# Altium PCB RGB_sensor_PCB1.PcbDoc
Units mm, origin at the board's own origin, x right, y up, seen from the top; angles counter-clockwise.
Board outline 62.99 x 88.5 mm, 2 copper layers (Top Layer, Bottom Layer), stack 1.071 mm thick; 20 components, 39 nets, 120 pads, 0 vias.
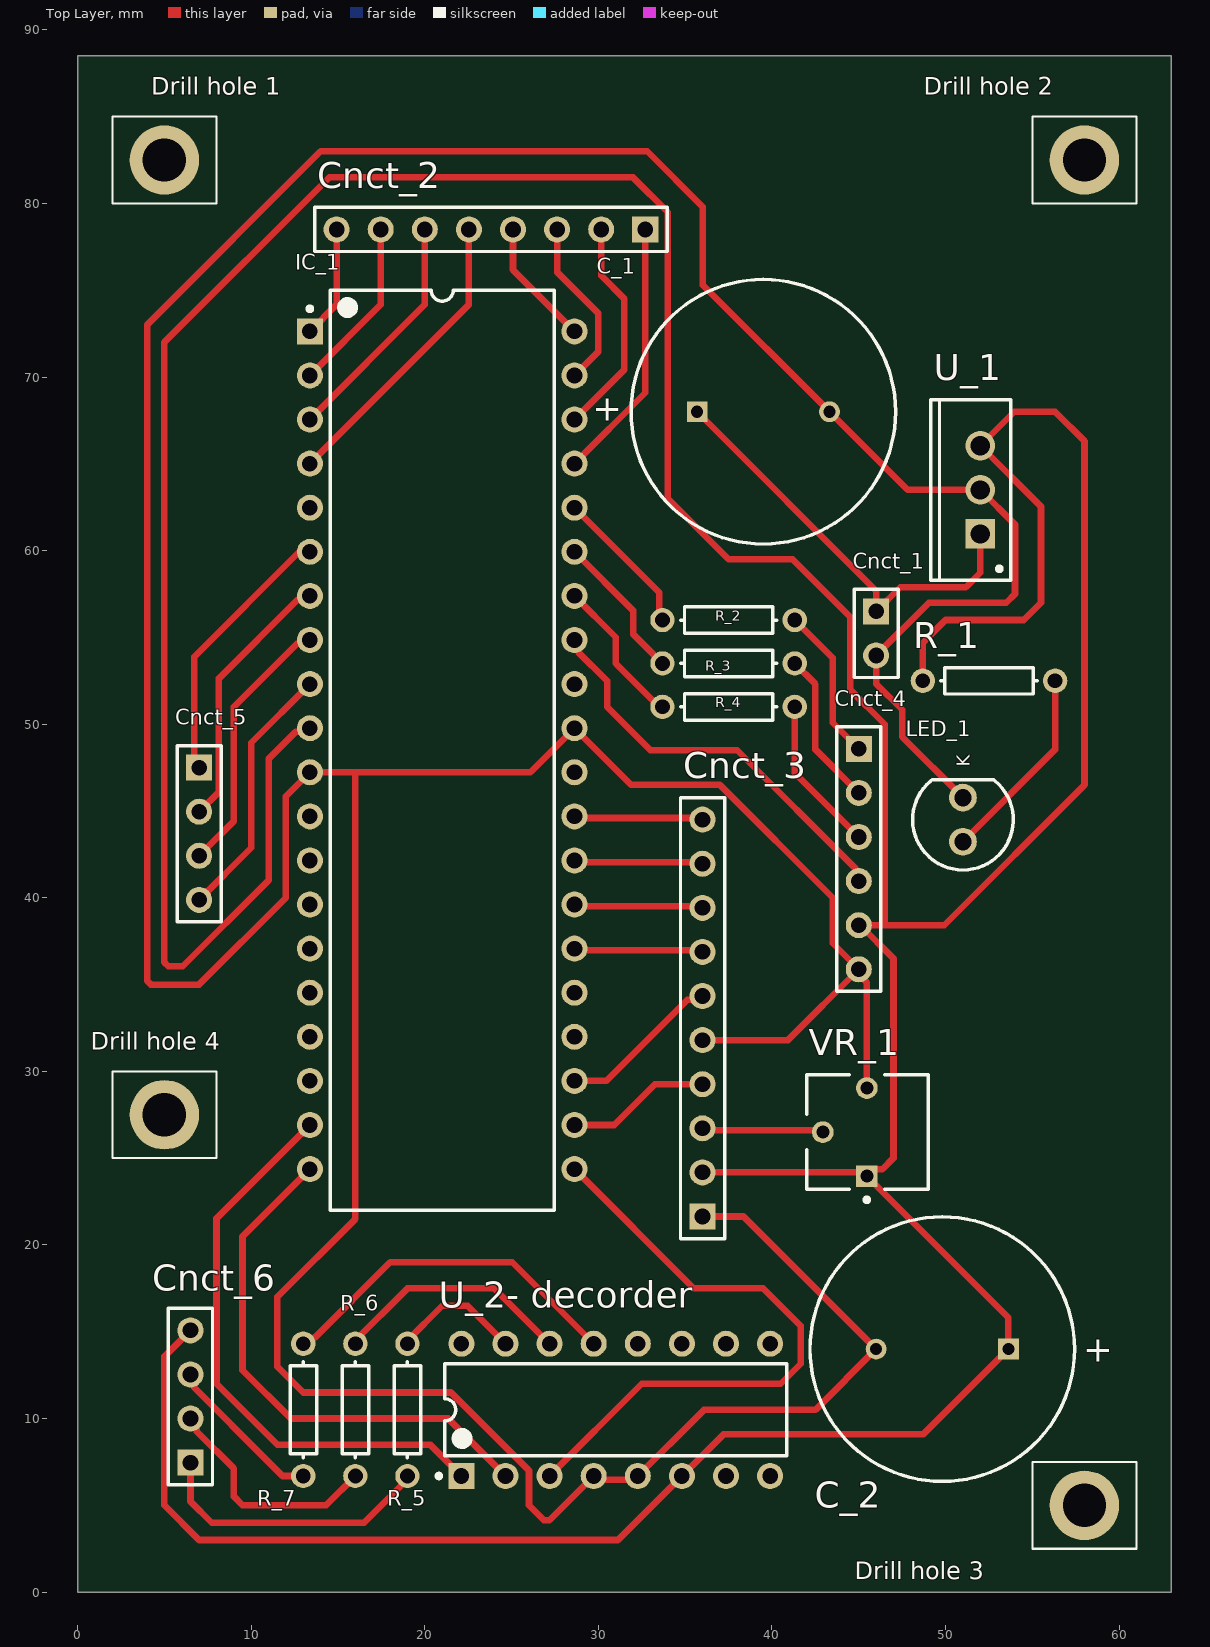
[diagram p0: Top Layer view]
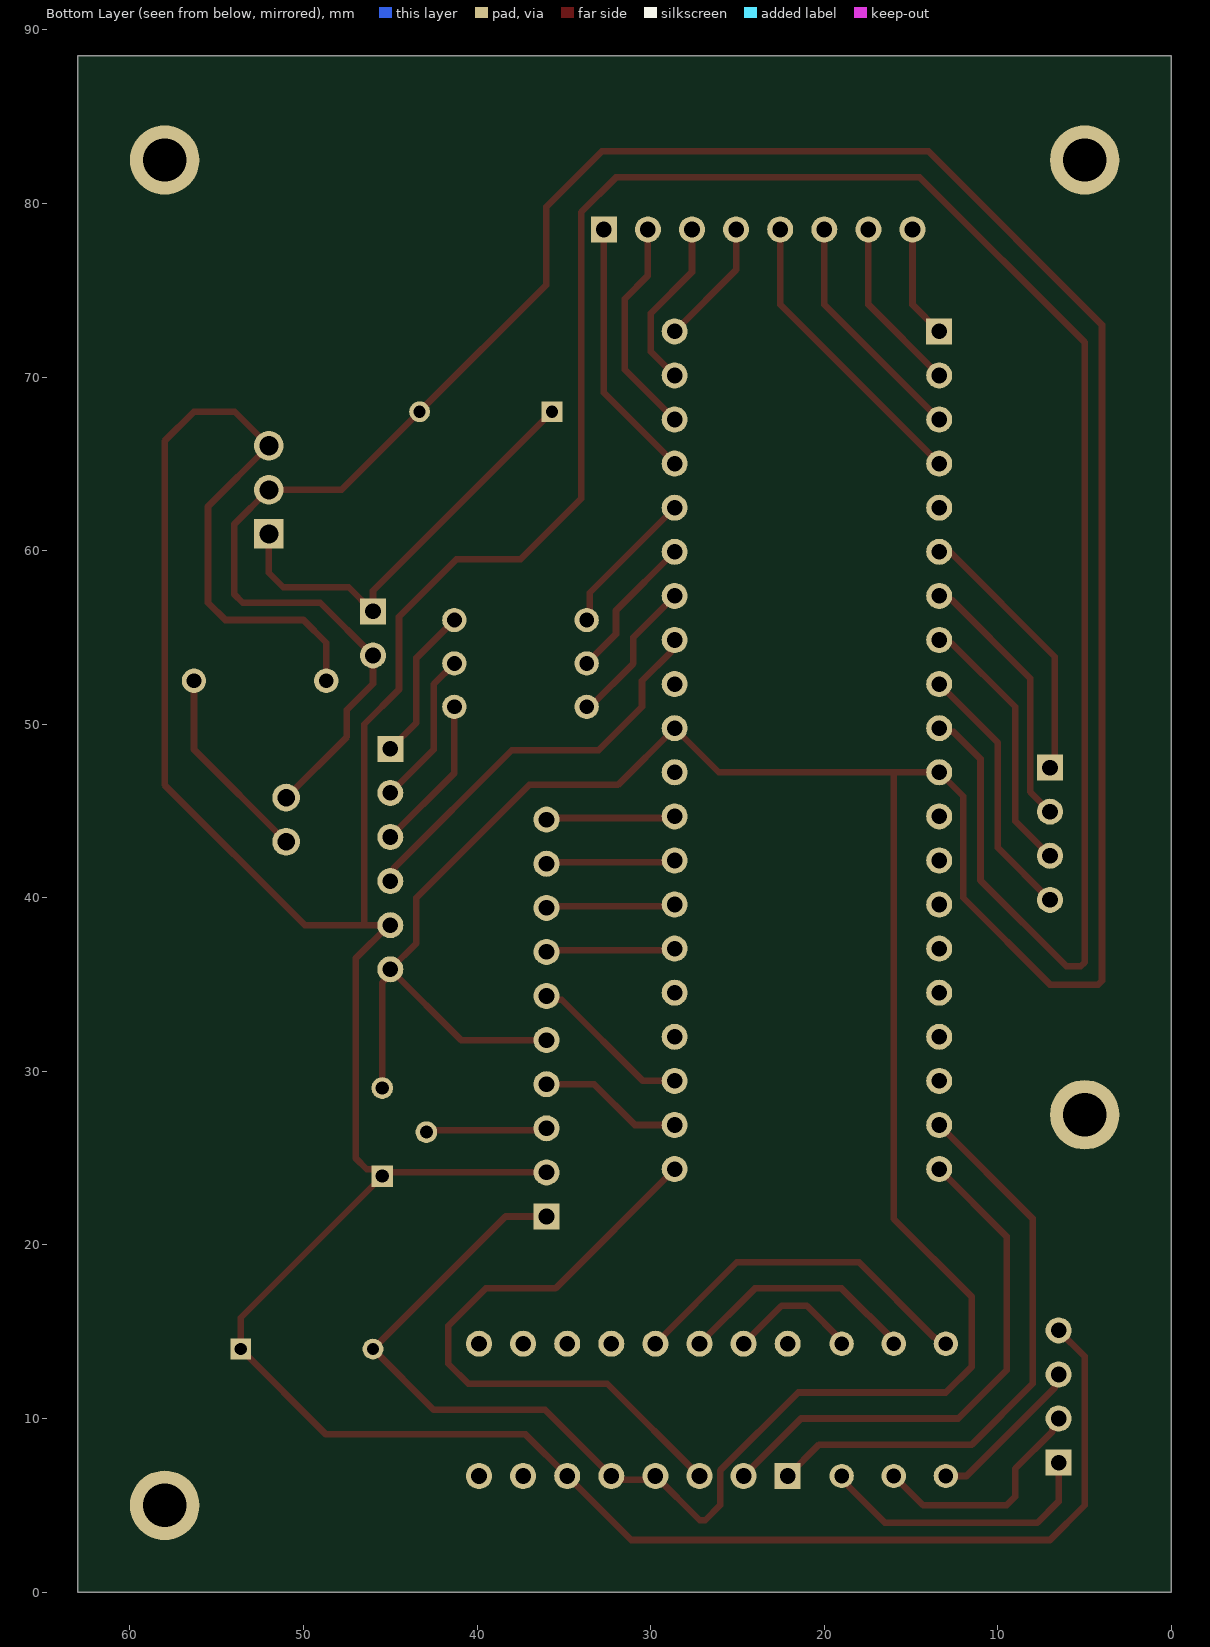
[diagram p1: Bottom Layer view, seen from below]

## Layer stack, top to bottom
Top Solder: solder mask 0.0102, Solder Resist, Dk 3.5
Top Layer: signal copper 0.0356
Dielectric 1: dielectric 1, FR-4, Dk 4.8
Bottom Layer: signal copper 0.0356
Bottom Solder: solder mask 0.0102, Solder Resist, Dk 3.5

## Board outline
0.013,0 63,0 63,88.5 0.013,88.5

## Design rules (kind name [scope] priority, off if disabled: settings)
Clearance [All] p1: gap=0.2 ignorepadtopadclearanceinfootprint=FALSE
PolygonConnect [All] p1: connectstyle=Relief reliefconductorwidth=0.254 reliefentries=4 polygonreliefangle="90 Angle" airgapwidth=0.254
RoutingVias [All] p1: holewidth=0.3 width=0.6 viastyle="Through Hole" minholewidth=0.3 minwidth=0.6 maxholewidth=0.3 maxwidth=0.6
SilkToSilkClearance [All] p1: silktosilkclearance=0.2
SilkToSolderMaskClearance [IsPad] p1: minsilkscreentomaskgap=0.11 clearancetoexposedcopper=TRUE
SolderMaskExpansion [All] p1: expansion=0.102 istentingtop=FALSE
Width [All] p1: maxlimit=1 minlimit=0.3 preferedwidth=0.5
28 further rules are at their usual default settings.

## Components (designator, comment, footprint, x,y, rotation, side; value= is the part's Value field where it differs from the comment)
C_1 "330nF" RB7.6-15 39.5,68 r180 top
C_2 "100nF" RB7.6-15 49.81,14 r0 top
Cnct_1 "Power" HDR1X2 46,56.5 r270 top
Cnct_2 "Key_board" HDR1X8 32.7,78.5 r180 top
Cnct_3 "LCD" HDR1X10 36,21.64 r90 top
Cnct_4 "Sensor" HDR1X6 45,48.58 r270 top
Cnct_5 "Prgm" HDR1X4 7,47.5 r270 top
Cnct_6 "RGB_LED" HDR1X4 6.5,7.46 r90 top
IC_1 "ATmega32A-PU" 40P6 21,48.5 r0 top
LED_1 "red" "Type 5mm" 51,44.5 r90 top
R_1 "330Ω" AXIAL-0.3 52.5,52.5 r0 top
R_2 "220Ω" AXIAL-0.3 37.5,56 r180 top
R_3 "220Ω" AXIAL-0.3 37.5,53.5 r180 top
R_4 "220Ω" AXIAL-0.3 37.5,51 r180 top
R_5 "220Ω" AXIAL-0.3 19,10.5 r270 top
R_6 "220Ω" AXIAL-0.3 16,10.5 r270 top
R_7 "220Ω" AXIAL-0.3 13,10.5 r270 top
U_1 "L7805ABV" TO220 52,63.5 r90 top
"U_2- decorder" "SN74HC138N" N0016A 31,10.5 r90 top
VR_1 "10k" BOUR-3362P 45.5,26.5 r90 top

## Footprints (in the part's own frame and the unit in brackets; to place one, negate y for a bottom-side part, rotate by r counter-clockwise, add the part's x,y. Pads: shape width x height; smd on the part's side, far side on the other; paste and mask are expansions set on the pad)
40P6 [mm] "40-Pin Ceramic Dual In-Line Package (CerDIP)"
  rect 1.5x1.5 hole 0.9: 1(-7.62,24.13)
  round 1.5 hole 0.9: 2(-7.62,21.59) 3(-7.62,19.05) 4(-7.62,16.51) 5(-7.62,13.97) 6(-7.62,11.43) 7(-7.62,8.89) 8(-7.62,6.35) 9(-7.62,3.81) 10(-7.62,1.27) 11(-7.62,-1.27) 12(-7.62,-3.81) 13(-7.62,-6.35) 14(-7.62,-8.89) 15(-7.62,-11.43) 16(-7.62,-13.97) 17(-7.62,-16.51) 18(-7.62,-19.05) 19(-7.62,-21.59) 20(-7.62,-24.13) 21(7.62,-24.13) 22(7.62,-21.59) 23(7.62,-19.05) 24(7.62,-16.51) 25(7.62,-13.97) 26(7.62,-11.43) 27(7.62,-8.89) 28(7.62,-6.35) 29(7.62,-3.81) 30(7.62,-1.27) 31(7.62,1.27) 32(7.62,3.81) 33(7.62,6.35) 34(7.62,8.89) 35(7.62,11.43) 36(7.62,13.97) 37(7.62,16.51) 38(7.62,19.05) 39(7.62,21.59) 40(7.62,24.13)
  silkscreen extent -7.74,-26.5 6.45,26.5, body extent -7.05,-26.47 7.05,26.47, height 5.72
AXIAL-0.3 [mm] "Axial Device, Thru-Hole; 2 Leads; 0.3 in Pin Spacing"
  round 1.4 hole 0.85: 1(-3.81,0) 2(3.81,0)
  silkscreen extent -2.77,-0.76 2.77,0.76
BOUR-3362P [mm] "THD, 3-Leads, Body 6.6x6.99mm, Pitch 2.54mm"
  rect 1.25x1.25 hole 0.75: 1(-2.54,0.035)
  round 1.25 hole 0.75: 2(0,2.575) 3(2.54,0.035)
  silkscreen extent -4.02,-3.49 3.3,3.5, body extent -3.3,-3.49 3.3,3.49, height 4.95
HDR1X2 [mm] "Connector; Header; 2 Position"
  rect 1.5x1.5 hole 0.9: 1(0,0)
  round 1.5 hole 0.9: 2(2.54,0)
  silkscreen extent -1.27,-1.27 3.81,1.27
HDR1X4 [mm] "Connector; Header; 4 Position"
  rect 1.5x1.5 hole 0.9: 1(0,0)
  round 1.5 hole 0.9: 2(2.54,0) 3(5.08,0) 4(7.62,0)
  silkscreen extent -1.27,-1.27 8.89,1.27
HDR1X6 [mm] "Connector; Header; 6 Position"
  rect 1.5x1.5 hole 0.9: 1(0,0)
  round 1.5 hole 0.9: 2(2.54,0) 3(5.08,0) 4(7.62,0) 5(10.16,0) 6(12.7,0)
  silkscreen extent -1.27,-1.27 13.97,1.27
HDR1X8 [mm] "Connector; Header; 8 Position"
  rect 1.5x1.5 hole 0.9: 1(0,0)
  round 1.5 hole 0.9: 2(2.54,0) 3(5.08,0) 4(7.62,0) 5(10.16,0) 6(12.7,0) 7(15.24,0) 8(17.78,0)
  silkscreen extent -1.27,-1.27 19.05,1.27
HDR1X10 [mm] "Connector; Header; 10 Position"
  rect 1.5x1.5 hole 0.9: 1(0,0)
  round 1.5 hole 0.9: 2(2.54,0) 3(5.08,0) 4(7.62,0) 5(10.16,0) 6(12.7,0) 7(15.24,0) 8(17.78,0) 9(20.32,0) 10(22.86,0)
  silkscreen extent -1.27,-1.27 24.13,1.27
N0016A [mm] "DIP, 16-Leads, Body 19.7x6.6mm, Pitch 2.54mm"
  rect 1.5x1.5 hole 0.9: 1(-3.81,8.89)
  round 1.5 hole 0.9: 2(-3.81,6.35) 3(-3.81,3.81) 4(-3.81,1.27) 5(-3.81,-1.27) 6(-3.81,-3.81) 7(-3.81,-6.35) 8(-3.81,-8.89) 9(3.81,-8.89) 10(3.81,-6.35) 11(3.81,-3.81) 12(3.81,-1.27) 13(3.81,1.27) 14(3.81,3.81) 15(3.81,6.35) 16(3.81,8.89)
  silkscreen extent -3.93,-9.85 2.65,10.31, body extent -3.95,-9.85 3.95,9.85, height 5.08
RB7.6-15 [mm] "Polarized Capacitor (Radial); 2 Leads"
  rect 1.2x1.2 hole 0.7: 1(3.81,0)
  round 1.2 hole 0.7: 2(-3.81,0)
  silkscreen extent -7.62,-7.62 7.62,7.62
TO220 [mm] "TO, Thru-Hole, Vertical, Heatsink Mounted; 3 In-Line Leads; Pitch 2.54 mm"
  rect 1.7x1.7 hole 1.1: 1(-2.54,0)
  round 1.7 hole 1.1: 2(0,0) 3(2.54,0)
  silkscreen extent -5.2,-1.75 5.2,2.85, body extent -5.25,-1.8 5.25,2.9, height 19.7
"Type 5mm" [mm] "THT, LED-5mm, 2pin- Body 5.8mm"
  round 1.6 hole 1: 1(1.27,0) 2(-1.27,0)
  silkscreen extent -2.9,-2.9 2.29,2.9, body extent -2.9,-2.9 2.5,2.9, height 11.7

## Part data
C_1 C_2: library part "Cap Pol1", "Polarized Capacitor (Radial)", LatestRevisionDate=17-Jul-2002, LatestRevisionNote="Re-released for DXP Platform.", PackageDescription="Polarized Capacitor (Radial); 2 Leads", PackageReference=RB7.6-15, Published=8-Jun-2000, Publisher="Altium Limited"
Cnct_1: library part "Header 2", "Header, 2-Pin", LatestRevisionDate=17-Jul-2002, LatestRevisionNote="Re-released for DXP Platform.", Publisher="Altium Limited"
Cnct_2: library part "Header 8", "Header, 8-Pin", LatestRevisionDate=17-Jul-2002, LatestRevisionNote="Re-released for DXP Platform.", Publisher="Altium Limited"
Cnct_3: library part "Header 10", "Header, 10-Pin", LatestRevisionDate=17-Jul-2002, LatestRevisionNote="Re-released for DXP Platform.", Publisher="Altium Limited"
Cnct_4: library part "Header 6", "Header, 6-Pin", LatestRevisionDate=17-Jul-2002, LatestRevisionNote="Re-released for DXP Platform.", Publisher="Altium Limited"
Cnct_5 Cnct_6: library part "Header 4", "Header, 4-Pin", LatestRevisionDate=17-Jul-2002, LatestRevisionNote="Re-released for DXP Platform.", Publisher="Altium Limited"
IC_1: library part CMP-0095-00028-2, "8-bit AVR Microcontroller, 2.7-5.5V, 16MHz, 32KB Flash, 1KB EEPROM, 2KB SRAM, 40-pin PDIP, Industrial Grade (-40°C to 85°C)", Code_JEDEC=MS-011-AC, ComponentLink1Description="Manufacturer URL", ComponentLink1URL=http://www.atmel.com/, ComponentLink2Description="ATmega32A Datasheet", ComponentLink2URL=http://www.atmel.com/dyn/resources/prod_documents/doc8155.pdf, ComponentLink3Description="ATmega32A Summary", ComponentLink3URL=http://www.atmel.com/dyn/resources/prod_documents/8155S.pdf, DatasheetVersion="revC, Feb-2011", PackageDescription="40-lead (0.600\"/15.24mm Wide) Plastic Dual Inline Package (PDIP)", PackageReference=40P6, PackageVersion="revB, Sep-2001", RevisionNote="DatasheetVersion updated. URLs added."
LED_1: library part CMP-1488-00008-1, "THT LED round mono-color color lens, WL-TMRW, Red", Emitting color=Red, Manufacturer="Wuerth Elektronik", PartNumber=151051RS11000, ComponentLink1Description="Manufacturer URL", ComponentLink1URL=http://www.we-online.com, ComponentLink2Description=Datasheet, ComponentLink2URL=http://katalog.we-online.de/pbs/datasheet/7448042001.pdfhttp://katalog.we-online.de/pbs/datasheet/7448042001.pdfhttp://katalog.we-online.de/pbs/datasheet/7448042001.pdfhttp://katalog.we-online.de/pbs/datasheet/151051RS11000.pdf, PackageReference="Type 5mm"
R_1 R_2 R_3 R_4 R_5 R_6 R_7: library part Res1, "Resistor", LatestRevisionDate=17-Jul-2002, LatestRevisionNote="Re-released for DXP Platform.", PackageDescription="Axial Device, Thru-Hole; 2 Leads; 0.3 in Pin Spacing", PackageReference=AXIAL-0.3, Published=8-Jun-2000, Publisher="Altium Limited"
U_1: library part CMP-0244-00485-1, "Positive Voltage Regulator, 5V, 3-Pin TO-220", ComponentLink1Description="Manufacturer URL", ComponentLink1URL=http://www.st.com, ComponentLink2Description=Datasheet, ComponentLink2URL=http://www.st.com/internet/com/TECHNICAL_RESOURCES/TECHNICAL_LITERATURE/DATASHEET/CD00000444.pdf, ComponentLink3Description="Package Specification", ComponentLink3URL=http://www.st.com/internet/com/TECHNICAL_RESOURCES/TECHNICAL_LITERATURE/PACKAGE_INFORMATION/CD00004649.pdf, DatasheetVersion=16/11/2011, PackageDescription="TO, Thru-Hole, Vertical, Heatsink Mounted; 3 In-Line Leads; Pitch 2.54 mm", PackageReference=TO220, PackageVersion=ver3.0
"U_2- decorder": library part CMP-1633-00627-2, "3-Line To 8-Line Decoders/Demultiplexers, N0016A, TUBE", F @ Nom Voltage(Max)(Mhz)=28, Generic Part Number=SN74HC138, ICC @ Nom Voltage(Max)(mA)=0.08, Manufacturer="Texas Instruments", Operating Temperature Range(C)="-40 to 85", Rating=Catalog, tpd @ Nom Voltage(Max)(ns)=45, Voltage(Nom)(V)=3.3,5, Bits(#)=8, Channels(#)=1, Code_JEDEC=MS-001, Configuration=3：8, DatasheetVersion=SCLS107E, Function=Decoder/Demultiplexer, Input Type=LVTTL/CMOS, Output Drive (IOL/IOH)(Max)(mA)=5.2/-5.2, Output Type=CMOS, PackageReference=N0016A, Schmitt Trigger=No, Technology Family=HC, Type=Standard, VCC(Max)(V)=6, VCC(Min)(V)=2
VR_1: library part CMP-1747-00003-1, "Square Trimpot(R) Trimming Potentiometer, 100 KOhm, 300 V, -55 to 125 degC, 3-Pin THD, RoHS, Tube", Case\Package=Axial, Max Operating Temperature="155 degC", Min Operating Temperature="-55 degC", Package Quantity=200, Power Rating="250 mW", Tolerance=1%, Voltage Rating="250 V", ComponentLink1Description="Manufacturer URL", ComponentLink1URL=http://www.bourns.com/, ComponentLink2Description=Datasheet, ComponentLink2URL=http://www.bourns.com/docs/Product-Datasheets/3362.pdf, DatasheetVersion=May-16, Length="0.248 inch", Mount="Through Hole", PackageDescription="3-Pin Through Hole Device, Body 6.6 x 6.99 mm, Pitch 2.54 mm", PackageReference=3326P, Packaging=Bulk, Resistance=10k, RoHSCompliant=true

## Free pads (board coordinates)
  round 4 hole 2.5: 43(5,82.5) 44(58,82.5) 45(58,5) 46(5,27.5)

## Nets (pads, with @x,y where several pads share a name; then routed paths per layer and width w, separated by ;. In a path a pad name is that pad's centre, name@x,y a point inside that pad or via, vN(x,y) a via of type N, cw(c..) or ccw(c..) an arc to the next point about the centre after c; other vN are vias at no path point)
+5: "U_2- decorder.6" C_2.1 Cnct_3.2 Cnct_4.5 Cnct_6.4 IC_1.10 R_1.1 U_1.3 VR_1.1 | length 304
  Top Layer w0.381: 5,72 5,36.279 5.223,36.056 6.056,36.056 11,41 11,48 12.556,49.556 13.166,49.556 IC_1.10 ; 5.01,72.01 14.5,81.5 32,81.5 34,79.5 34,63 37.5,59.5 41.19,59.5 44.5,56.19 44.5,52 46.5,50 46.5,38.42 ; Cnct_6.4 5,13.58 5,5 7,3 31.12,3 34.81,6.69 37.206,9.086 48.706,9.086 C_2.1 53.62,15.805 VR_1.1 ; Cnct_3.2 45.245,24.18 VR_1.1 ; Cnct_4.5 Cnct_4.5@45.08,38.42 ; R_1.1 48.69,54.69 50,56 54.5,56 55.5,57 55.5,62.54 U_1.3 53.96,68 56.31,68 58,66.31 58,46.5 49.92,38.42 46.5,38.42 ; Cnct_4.5@45.08,38.42 46.5,38.42 ; Cnct_4.5@45.08,38.42 47,36.5 47,25 46.361,24.361 45.866,24.361 VR_1.1
GND: "U_2- decorder.4" "U_2- decorder.5" C_1.2 C_2.2 Cnct_1.2 Cnct_3.1 Cnct_3.5 Cnct_4.6 IC_1.11 IC_1.31 LED_1.1 U_1.2 VR_1.3 | length 295.7
  Top Layer w0.381: Cnct_3.1 38.36,21.64 C_2.2 42.5,10.5 36.08,10.5 32.056,6.476 31.488,6.476 30.513,6.475 29.944,6.476 29.73,6.69 27.178,4.138 26.862,4.138 26,5 26,7 21.5,11.5 13,11.5 11.5,13 11.5,17 16,21.5 16,47.23 ; Cnct_3.5 40.92,31.8 Cnct_4.6 ; VR_1.3 45.465,35.112 45,35.577 Cnct_4.6 ; LED_1.1 47.5,49.27 47.5,50.829 46,52.329 Cnct_1.2 49.04,57 53.5,57 54,57.5 54,61.5 U_1.2 47.81,63.5 C_1.2 43.31,68.006 36.016,75.3 36.016,79.794 32.81,83 14,83 4,73 4,35.223 4.223,35 7,35 12,40 12,45.85 IC_1.11 16,47.23 ; 16,47.23 26.08,47.23 IC_1.31 31.89,46.5 37,46.5 43.5,40 43.5,37.38 Cnct_4.6
NetCnct_2_1: Cnct_2.1 IC_1.37 | length 15.2
  Top Layer w0.381: IC_1.37 32.7,69.09 Cnct_2.1
NetCnct_2_2: Cnct_2.2 IC_1.38 | length 12.7
  Top Layer w0.381: IC_1.38 31.5,70.43 31.5,74.5 30.16,75.84 Cnct_2.2
NetCnct_2_3: Cnct_2.3 IC_1.39 | length 10
  Top Layer w0.381: Cnct_2.3 27.62,76.04 30.002,73.658 30.002,71.472 IC_1.39
NetCnct_2_4: Cnct_2.4 IC_1.40 | length 7.3
  Top Layer w0.381: Cnct_2.4 25.08,76.17 IC_1.40
NetCnct_2_5: Cnct_2.5 IC_1.4 | length 17.3
  Top Layer w0.381: IC_1.4 22.54,74.17 Cnct_2.5
NetCnct_2_6: Cnct_2.6 IC_1.3 | length 13.7
  Top Layer w0.381: IC_1.3 20,74.17 Cnct_2.6
NetCnct_2_7: Cnct_2.7 IC_1.2 | length 10.1
  Top Layer w0.381: IC_1.2 17.46,74.17 Cnct_2.7
NetCnct_2_8: Cnct_2.8 IC_1.1 | length 6.5
  Top Layer w0.381: IC_1.1 14.92,74.17 Cnct_2.8
NetCnct_3_3: Cnct_3.3 VR_1.2 | length 7
  Top Layer w0.381: Cnct_3.3 36.11,26.61 42.815,26.61 VR_1.2
NetCnct_3_4: Cnct_3.4 IC_1.22 | length 8.4
  Top Layer w0.381: IC_1.22 30.91,26.91 33.26,29.26 Cnct_3.4
NetCnct_3_6: Cnct_3.6 IC_1.23 | length 9.4
  Top Layer w0.381: IC_1.23 30.45,29.45 35.126,34.126 35.786,34.126 Cnct_3.6
NetCnct_3_7: Cnct_3.7 IC_1.26 | length 7.5
  Top Layer w0.381: IC_1.26 28.715,36.975 35.905,36.975 Cnct_3.7
NetCnct_3_8: Cnct_3.8 IC_1.27 | length 7.5
  Top Layer w0.381: IC_1.27 28.715,39.515 35.905,39.515 Cnct_3.8
NetCnct_3_9: Cnct_3.9 IC_1.28 | length 7.5
  Top Layer w0.381: IC_1.28 28.715,42.055 35.905,42.055 Cnct_3.9
NetCnct_3_10: Cnct_3.10 IC_1.29 | length 7.8
  Top Layer w0.381: IC_1.29 28.715,44.595 35.905,44.595 Cnct_3.10 Cnct_3.10@35.697,44.5
NetCnct_4_1: Cnct_4.1 R_2.1 | length 8.9
  Top Layer w0.381: R_2.1 43.5,53.81 43.5,50.08 Cnct_4.1
NetCnct_4_2: Cnct_4.2 R_3.1 | length 9
  Top Layer w0.381: R_3.1 42.5,52.31 42.5,48.54 Cnct_4.2
NetCnct_4_3: Cnct_4.3 R_4.1 | length 9
  Top Layer w0.381: R_4.1 41.31,47.19 Cnct_4.3
NetCnct_4_4: Cnct_4.4 IC_1.33 | length 23.6
  Top Layer w0.381: IC_1.33 28.834,54.636 28.834,54.166 30.5,52.5 30.5,51 33,48.5 38,48.5 44.786,41.714 44.786,41.174 Cnct_4.4
NetCnct_5_1: Cnct_5.1 IC_1.6 | length 15.7
  Top Layer w0.381: Cnct_5.1 6.724,47.776 6.724,53.889 12.765,59.93 IC_1.6
NetCnct_5_2: Cnct_5.2 IC_1.7 | length 15.4
  Top Layer w0.381: Cnct_5.2 8.141,46.1 8.141,52.641 12.676,57.176 13.166,57.176 IC_1.7
NetCnct_5_3: Cnct_5.3 IC_1.8 | length 15.4
  Top Layer w0.381: Cnct_5.3 9,44.42 9,51 12.636,54.636 13.166,54.636 IC_1.8
NetCnct_5_4: Cnct_5.4 IC_1.9 | length 15.1
  Top Layer w0.381: Cnct_5.4 10,42.88 10,48.93 IC_1.9
NetCnct_6_1: Cnct_6.1 R_5.2 | length 16.5
  Top Layer w0.381: Cnct_6.1 6.5,5.223 7.723,4 16.5,4 19,6.5 R_5.2
NetCnct_6_2: Cnct_6.2 R_6.2 | length 13.4
  Top Layer w0.381: Cnct_6.2 6.5,9.697 6.86,9.337 6.86,9.253 9,7.113 9,5.5 9.5,5 14.31,5 R_6.2
NetCnct_6_3: Cnct_6.3 R_7.2 | length 9.2
  Top Layer w0.381: Cnct_6.3 6.714,12.326 6.714,11.786 11,7.5 11.81,6.69 R_7.2
NetIC_1_19: "U_2- decorder.1" IC_1.19 | length 33.4
  Top Layer w0.381: IC_1.19 8,21.53 8,12 11.5,8.5 20.3,8.5 22.11,6.69
NetIC_1_20: "U_2- decorder.2" IC_1.20 | length 30.9
  Top Layer w0.381: IC_1.20 9.5,20.49 9.5,12.786 12.286,10 21.34,10 24.65,6.69
NetIC_1_21: "U_2- decorder.3" IC_1.21 | length 36.1
  Top Layer w0.381: 27.19,6.69 32.5,12 40.5,12 41.661,13.161 41.661,15.339 39.5,17.5 35.49,17.5 IC_1.21
NetIC_1_34: IC_1.34 R_4.2 | length 8.6
  Top Layer w0.381: IC_1.34 31,55.01 31,53.5 33.5,51 R_4.2
NetIC_1_35: IC_1.35 R_3.2 | length 8.5
  Top Layer w0.381: IC_1.35 32,56.55 32,55.19 R_3.2
NetIC_1_36: IC_1.36 R_2.2 | length 8.6
  Top Layer w0.381: IC_1.36 33.516,57.574 33.516,56.174 R_2.2
NetLED_1_2: LED_1.2 R_1.2 | length 11.5
  Top Layer w0.381: LED_1.2 56.31,48.54 R_1.2
NetR_5_1: "U_2- decorder.15" R_5.1 | length 7.6
  Top Layer w0.381: R_5.1 19,14.5 21,16.5 22.46,16.5 24.65,14.31
NetR_6_1: "U_2- decorder.14" R_6.1 | length 13.9
  Top Layer w0.381: R_6.1@15.905,14.405 19,17.5 24,17.5 27.19,14.31
NetR_7_1: "U_2- decorder.13" R_7.1 | length 20.6
  Top Layer w0.381: R_7.1@12.639,14.673 R_7.1@12.673,14.673 ; R_7.1 13.276,14.31 13.639,14.673 13.673,14.673 18,19 25.04,19 29.73,14.31
VCC: C_1.1 Cnct_1.1 U_1.1 | length 24.9
  Top Layer w0.381: C_1.1 46,57.69 Cnct_1.1 47.391,57.891 51.168,57.891 52,58.723 U_1.1
pads on no net: "U_2- decorder.7" "U_2- decorder.8" "U_2- decorder.9" "U_2- decorder.10" "U_2- decorder.11" "U_2- decorder.12" "U_2- decorder.16" IC_1.5 IC_1.12 IC_1.13 IC_1.14 IC_1.15 IC_1.16 IC_1.17 IC_1.18 IC_1.24 IC_1.25 IC_1.30 IC_1.32

## Silkscreen, mask and mechanical layers (free items; w line width, h text height)
Top Overlay:
  lines w0.125: 2,25 2,30 8,30 8,25 2,25 ; 2,80 2,85 8,85 8,80 2,80 ; 55,2.5 55,7.5 61,7.5 61,2.5 55,2.5 ; 55,80 55,85 61,85 61,80 55,80
  text "Drill hole 1" at 4.254,86.254 h1
  text "Drill hole 2" at 48.754,86.254 h1
  text "Drill hole 4" at 0.754,31.254 h1
  text "Drill hole 3" at 44.754,0.754 h1

## Text inside footprints (layer, text, board x,y; h text height)
C_1: Top Overlay "+" at 31.368,68.737 h1.5 r180
C_2: Top Overlay "+" at 57.942,13.263 h1.5
LED_1: Top Overlay "K" at 51.381,47.548 h0.76 r90; Mechanical 15 "K" at 51.381,47.548 h0.76 r90